# Altium PCB PCB3.PcbDoc
Units mil, origin at the board's own origin, x right, y up, seen from the top; angles counter-clockwise.
Board outline 2610 x 3445 mil, 2 copper layers (Top Layer, Bottom Layer); 20 components, 25 nets, 163 pads, 3 vias.
Unrouted connection lines stored in the file: 1.
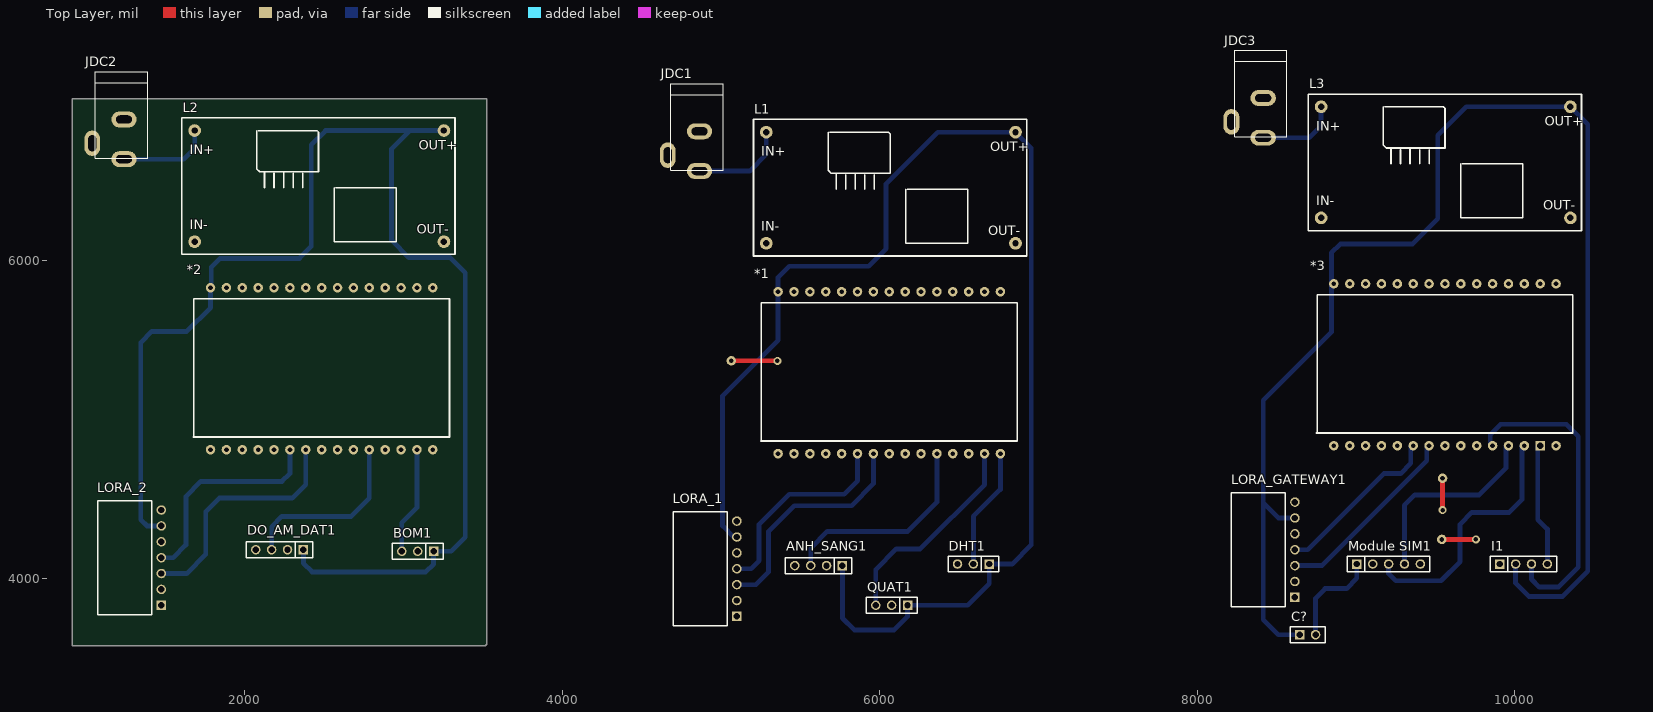
[diagram p0: Top Layer view]
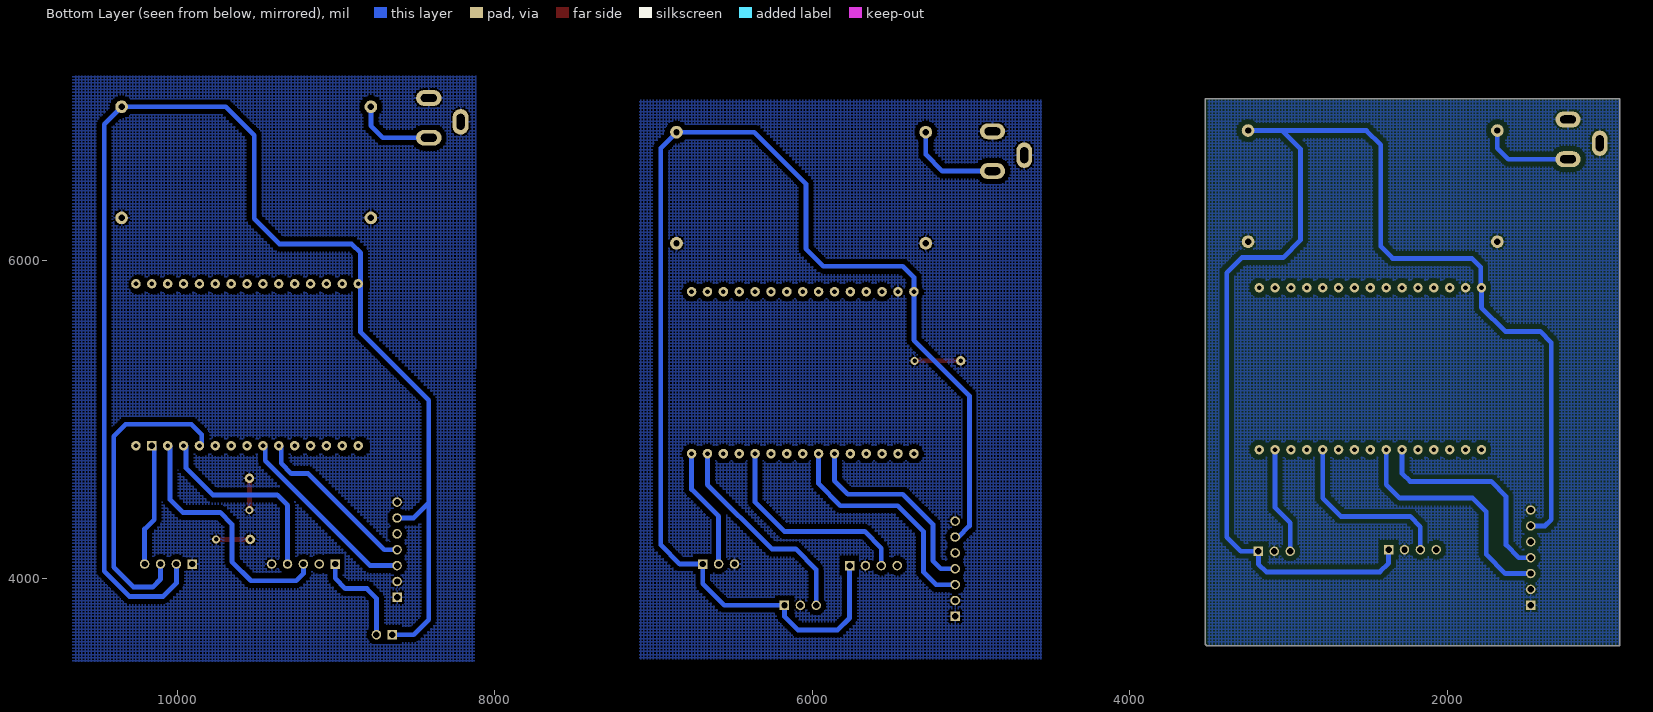
[diagram p1: Bottom Layer view, seen from below]

## Layer stack, top to bottom
Top Solder: solder mask 0.4, Solder Resist, Dk 3.5
Top Layer: signal copper 1.4
Dielectric 1: dielectric 12.6, FR-4, Dk 4.8
Bottom Layer: signal copper 1.4
Bottom Solder: solder mask 0.4, Solder Resist, Dk 3.5

## Board outline
915,3575 3515,3575 3525,3585 3525,7020 915,7020

## Design rules (kind name [scope] priority, off if disabled: settings)
Clearance [All] p1: gap=30
PolygonConnect [All] p1: connectstyle=Relief reliefconductorwidth=10 reliefentries=4 polygonreliefangle="90 Angle" airgapwidth=10
RoutingVias [All] p1: holewidth=28 width=50 viastyle="Through Hole" minholewidth=28 minwidth=50 maxholewidth=28 maxwidth=50
SolderMaskExpansion [All] p1: expansion=4
Width [All] p1: maxlimit=30 minlimit=10 preferedwidth=20
30 further rules are at their usual default settings.

## Components (designator, comment, footprint, x,y, rotation, side; value= is the part's Value field where it differs from the comment)
*1 "Component_1" PCBComponent_1#1 6040,5280 r180 top
*2 "Component_1" PCBComponent_1#1 2465,5305 r180 top
*3 "Component_1" PCBComponent_1#2 9540,5330 r180 top
ANH_SANG1 "JP4" JP4-C1T 5765,4080 r180 top
BOM1 "JP3" JP3-C1T 3190,4170 r180 top
C? "JP2" JP2-C1T 8645,3645 r0 top
DHT1 "JP3" JP3-C1T 6690,4090 r180 top
DO_AM_DAT1 "JP4" JP4-C1T 2370,4180 r180 top
I1 "JP4" JP4-C1T 9905,4090 r0 top
JDC1 "Jac DC" DC0 4765,6690 r270 top
JDC2 "Jac DC" DC0 1140,6765 r270 top
JDC3 "Jac DC" DC0 8315,6900 r270 top
L1 "BUCK_LM2596" BUCK_LM2596 6055,6490 r0 top
L2 "BUCK_LM2596" BUCK_LM2596 2455,6500 r0 top
L3 "BUCK_LM2596" BUCK_LM2596 9550,6650 r0 top
LORA_1 "JP7" JP7-C1C 5100,4060 r90 top
LORA_2 "JP7" JP7-C1C 1475,4130 r90 top
LORA_GATEWAY1 "JP7" JP7-C1C 8615,4180 r90 top
"Module SIM1" "JP5" JP5-C1T 9005,4090 r0 top
QUAT1 "JP3" JP3-C1T 6175,3830 r180 top

## Footprints (in the part's own frame and the unit in brackets; to place one, negate y for a bottom-side part, rotate by r counter-clockwise, add the part's x,y. Pads: shape width x height; smd on the part's side, far side on the other; paste and mask are expansions set on the pad)
BUCK_LM2596 [mil]
  round 80 hole 40: 1(-770,320) 2(-770,-380) 3(800,-380) 4(800,320)
  silkscreen extent -850,-460 870,400
DC0 [mil] "Jac DC input"
  oval 100x160 hole 50 slot 100 at 90 deg: 1(125,100) 2(-125,100)
  oval 160x100 hole 50 slot 100 at 0 deg: 3(25,-100)
  silkscreen extent -425,-80 120,250, body extent -410,-105 134,269, height 434
JP2-C1T [mm] "2 row, straight, gold plating"
  rect 1.52x1.52 hole 1.02: 1(0,0)
  round 1.52 hole 1.02: 2(2.54,0)
  silkscreen extent -1.52,-1.27 4.06,1.27, body extent -1.52,-1.25 4.06,1.25, height 8.51
JP3-C1T [mm] "3 row, straight, gold plating"
  rect 1.52x1.52 hole 1.02: 1(0,0)
  round 1.52 hole 1.02: 2(2.54,0) 3(5.08,0)
  silkscreen extent -1.52,-1.27 6.6,1.27, body extent -1.52,-1.25 6.6,1.25, height 8.51
JP4-C1T [mm] "4 row, straight, gold plating"
  rect 1.52x1.52 hole 1.02: 1(0,0)
  round 1.52 hole 1.02: 2(2.54,0) 3(5.08,0) 4(7.62,0)
  silkscreen extent -1.52,-1.27 9.14,1.27, body extent -1.52,-1.25 9.14,1.25, height 8.51
JP5-C1T [mm] "5 row, straight, gold plating"
  rect 1.52x1.52 hole 1.02: 1(0,0)
  round 1.52 hole 1.02: 2(2.54,0) 3(5.08,0) 4(7.62,0) 5(10.16,0)
  silkscreen extent -1.52,-1.27 11.68,1.27, body extent -1.52,-1.25 11.68,1.25, height 8.51
JP7-C1C [mm] "07p 1 row Right angle"
  rect 1.52x1.52 hole 1.02: 1(-7.62,0)
  round 1.52 hole 1.02: 2(-5.08,0) 3(-2.54,0) 4(0,0) 5(2.54,0) 6(5.08,0) 7(7.62,0)
  silkscreen extent -9.14,1.52 9.14,10.17, body extent -9.14,-0.25 9.14,10.05, height 2.51
PCBComponent_1#1 [mil]
  round 60 hole 30: 0(-720,-525) 1(-620,-525) 2(-520,-525) 3(-420,-525) 4(-320,-525) 5(-220,-525) 6(-120,-525) 7(-20,-525) 8(80,-525) 9(180,-525) 10(280,-525) 11(380,-525) 12(480,-525) 13(580,-525) 14(680,-525) 15(-720,495) 16(-620,495) 17(-520,495) 18(-420,495) 19(-320,495) 20(-220,495) 21(-120,495) 22(-20,495) 23(80,495) 24(180,495) 25(280,495) 26(380,495) 27(480,495) 28(580,495) 29(680,495)
  silkscreen extent -825,-455 790,415, body extent -880,-580 840,560, height 50
PCBComponent_1#2 [mil]
  round 60 hole 30: 0(-720,-525) 1(-620,-525) 2(-520,-525) 3(-420,-525) 4(-320,-525) 5(-220,-525) 6(-120,-525) 7(-20,-525) 8(80,-525) 9(180,-525) 10(280,-525) 11(380,-525) 12(480,-525) 13(580,-525) 14(680,-525) 15(-720,495) 17(-520,495) 18(-420,495) 19(-320,495) 20(-220,495) 21(-120,495) 22(-20,495) 23(80,495) 24(180,495) 25(280,495) 26(380,495) 27(480,495) 28(580,495) 29(680,495)
  rect 59.84x59.84 hole 40.16: 16(-620,495)
  silkscreen extent -825,-455 790,415, body extent -880,-580 840,560, height 50

## Part data
ANH_SANG1 BOM1 C? DHT1 DO_AM_DAT1 I1 LORA_1 LORA_2 LORA_GATEWAY1 "Module SIM1" QUAT1: "WR-PHD 2.54 mm Angled Socket Header"
JDC1 JDC2 JDC3: library part DCIN, "Jac DC input"

## Free pads (board coordinates)
  round 60 hole 30: 4(9545,4630) 5(9540,4245) 9(5065,5370)

## Via types
v1: diameter 50, hole 28, Top Layer to Bottom Layer, 3 vias

## Nets (pads, with @x,y where several pads share a name; then routed paths per layer and width w, separated by ;. In a path a pad name is that pad's centre, name@x,y a point inside that pad or via, vN(x,y) a via of type N, cw(c..) or ccw(c..) an arc to the next point about the centre after c; other vN are vias at no path point)
D0: *1.19 ANH_SANG1.3 | length 1330.1
  Bottom Layer w30: ANH_SANG1.3 5565,4190 5670,4295 6175,4295 6360,4480 *1.19
D0_2: *2.19 DO_AM_DAT1.3 | length 1139.6
  Bottom Layer w30: DO_AM_DAT1.3 2170,4325 2235,4390 2670,4390 2785,4505 *2.19
DHT: *1.15 DHT1.2 | length 765.4
  Bottom Layer w30: DHT1.2 6590,4390 6760,4560 *1.15
GND1: *1.13 ANH_SANG1.2 DHT1.3 JDC1.2 JDC1.3 L1.2 L1.3 LORA_1.1 LORA_1.2 LORA_1.7 pad.9 QUAT1.2 | length 290
  Top Layer w30: pad.9 v1(5355,5370)
GND2: *2.13 BOM1.2 DO_AM_DAT1.2 JDC2.2 JDC2.3 L2.2 L2.3 LORA_2.1 LORA_2.2 LORA_2.7
GND3: "Module SIM1.5" I1.1 JDC3.2 JDC3.3 L3.2 L3.3 LORA_GATEWAY1.1 LORA_GATEWAY1.2 LORA_GATEWAY1.7 pad.4 pad.5 | length 415
  Top Layer w30: pad.5 v1(9755,4245) ; v1(9545,4430) pad.4
NetC?_2: "Module SIM1.1" C?.2 | length 631.8
  Bottom Layer w30: C?.2 8745,3875 8805,3935 8940,3935 9005,4000 9005,4090
NetJDC1_1: JDC1.1 L1.1 | length 603.5
  Bottom Layer w30: JDC1.1 5180,6565 5285,6670 L1.1
NetJDC2_1: JDC2.1 L2.1 | length 584
  Bottom Layer w30: JDC2.1 1615,6640 1685,6710 L2.1
NetJDC3_1: JDC3.1 L3.1 | length 516.1
  Bottom Layer w30: JDC3.1 8705,6775 8780,6850 L3.1
RELAY: *1.16 QUAT1.3 | length 1326.6
  Bottom Layer w30: QUAT1.3 5975,4055 6105,4185 6255,4185 6660,4590 *1.16
RELAY_2: *2.16 BOM1.3 | length 679.4
  Bottom Layer w30: BOM1.3 2990,4350 3085,4445 *2.16
RX: *1.24 LORA_1.4 | length 1294.6
  Bottom Layer w30: LORA_1.4 5190,4060 5240,4110 5240,4340 5430,4530 5775,4530 5860,4615 *1.24
RX_2: *2.24 LORA_2.4 | length 1358.2
  Bottom Layer w30: LORA_2.4 1550,4130 1630,4210 1630,4515 1725,4610 2235,4610 2285,4660 *2.24
RX_3: LORA_GATEWAY1.4 | length 1060.7
  Bottom Layer w30: LORA_GATEWAY1.4 8695,4180 9175,4660 9280,4660 9345,4725 9345,4830
RX_SIM: "Module SIM1.3" | length 1602.5
  Bottom Layer w30: 9205,4090 9205,4030 9250,3985 9535,3985 9655,4105 9655,4340 9730,4415 9965,4415 10045,4495 10045,4830
SCL: I1.4 | length 764.9
  Bottom Layer w30: 10145,4830 10145,4370 10205,4310 I1.4
SDA: I1.3 | length 1975.5
  Bottom Layer w30: 9845,4830 9845,4905 9910,4970 10325,4970 10400,4895 10400,4070 10275,3945 10155,3945 10105,3995 I1.3
TX: *1.23 LORA_1.3 | length 1462.4
  Bottom Layer w30: LORA_1.3 5220,3960 5300,4040 5300,4295 5462.57,4457.57 5822.57,4457.57 5960,4595 *1.23
TX_2: *2.23 LORA_2.3 | length 1520.1
  Bottom Layer w30: LORA_2.3 1635,4030 1755,4150 1755,4420 1840,4505 2300,4505 2385,4590 *2.23
TX_3: LORA_GATEWAY1.3 | length 1193.3
  Bottom Layer w30: LORA_GATEWAY1.3 8784.85,4080 9445,4740.15 9445,4830
TX_SIM: "Module SIM1.4" | length 1242.3
  Bottom Layer w30: 9305,4090 9305,4460 9370,4525 9775,4525 9945,4695 9945,4830
VCC1: *1.14 ANH_SANG1.1 DHT1.1 L1.4 LORA_1.6 QUAT1.1 | length 8451.5
  Bottom Layer w30: LORA_1.6@5080,4260 5010,4330 5010,5150 5360,5500 *1.14 5360,5895 5430,5965 5930,5965 6040,6075 6040,6485 6365,6810 L1.4 6955,6710 6955,4210 6835,4090 DHT1.1 6690,3965 6555,3830 QUAT1.1 6175,3760 6090,3675 5840,3675 5765,3750 ANH_SANG1.1
VCC2: *2.14 BOM1.1 DO_AM_DAT1.1 L2.4 LORA_2.6 | length 8464.2
  Bottom Layer w30: LORA_2.6 1385,4330 1345,4370 1345,5485 1415,5555 1635,5555 1785,5705 *2.14 1790,5835 1790,5960 1845,6015 2345,6015 2420,6090 2420,6730 2510,6820 3040,6820 ; DO_AM_DAT1.1 2370,4095 2425,4040 3140,4040 3190,4090 BOM1.1 3300,4170 3390,4260 3390,5925 3295,6020 3035,6020 2925,6130 2925,6705 3040,6820 ; L2.4 3040,6820
VCC3: C?.1 I1.2 L3.4 LORA_GATEWAY1.6 | length 8837.4
  Bottom Layer w30: LORA_GATEWAY1.6 8510,4380 8415,4475 ; C?.1 8510,3645 8415,3740 8415,4475 ; I1.2 10005,3970 10090,3885 10299.85,3885 10460,4045.15 10460,6860 L3.4 9695,6970 9515,6790 9515,6265 9355,6105 8900,6105 8845,6050 8845,5550 8415,5120 8415,4475
pads on no net: "Module SIM1.2" *1.0 *1.1 *1.2 *1.3 *1.4 *1.5 *1.6 *1.7 *1.8 *1.9 *1.10 *1.11 *1.12 *1.17 *1.18 *1.20 *1.21 *1.22 *1.25 *1.26 *1.27 *1.28 *1.29 *2.0 *2.1 *2.2 *2.3 *2.4 *2.5 *2.6 *2.7 *2.8 *2.9 *2.10 *2.11 *2.12 *2.15 *2.17 *2.18 *2.20 *2.21 *2.22 *2.25 *2.26 *2.27 *2.28 *2.29 *3.0 *3.1 *3.2 *3.3 *3.4 *3.5 *3.6 *3.7 *3.8 *3.9 *3.10 *3.11 *3.12 *3.13 *3.14 *3.15 *3.16 *3.17 *3.18 *3.19 *3.20 *3.21 *3.22 *3.23 *3.24 *3.25 *3.26 *3.27 *3.28 *3.29 ANH_SANG1.4 DO_AM_DAT1.4 LORA_1.5 LORA_2.5 LORA_GATEWAY1.5

## Polygon pours and split planes (outlines as drawn)
GND1 on Bottom Layer "Bottom Layer-No Net" (hatched 90Degree grid 20 track 8, remove dead copper, pour order 16): 4555,7015 7090,7015 7090,6405 7090,3490 4555,3490
GND3 on Bottom Layer "Bottom Layer-No Net" (hatched 90Degree grid 20 track 8, remove dead copper, pour order 12): 8115,7165 10660,7165 10660,3470 10655,3465 10645,3475 8125,3475
GND2 on Bottom Layer "Bottom Layer-No Net" (hatched 90Degree grid 20 track 8, remove dead copper, pour order 10): 915,7015 3510,7015 3515,7020 3510,7015 3510,3580 920,3580

## Silkscreen, mask and mechanical layers (free items; w line width, h text height)
Mechanical 1:
  lines w10: 915,3575 3310,3575 3515,3575 3525,3585 3525,7020 915,7020 ; 4565,7015 4555,7015 ; 4555,7015 4555,3495 7080,3495 7090,3505 7090,7015 4555,7015 ; 8120,3470 8120,7165 10660,7165 10660,3475 8125,3475 8120,3470

## Text inside footprints (layer, text, board x,y; h text height)
L1: Top Overlay "IN+" at 5255,6660 h60; Top Overlay "IN-" at 5255,6190 h60; Top Overlay "OUT+" at 6695,6690 h60; Top Overlay "OUT-" at 6685,6160 h60
L2: Top Overlay "IN+" at 1655,6670 h60; Top Overlay "IN-" at 1655,6200 h60; Top Overlay "OUT+" at 3095,6700 h60; Top Overlay "OUT-" at 3085,6170 h60
L3: Top Overlay "IN+" at 8750,6820 h60; Top Overlay "IN-" at 8750,6350 h60; Top Overlay "OUT+" at 10190,6850 h60; Top Overlay "OUT-" at 10180,6320 h60